# EAGLE board Detector_oneside (EAGLE 5.11)
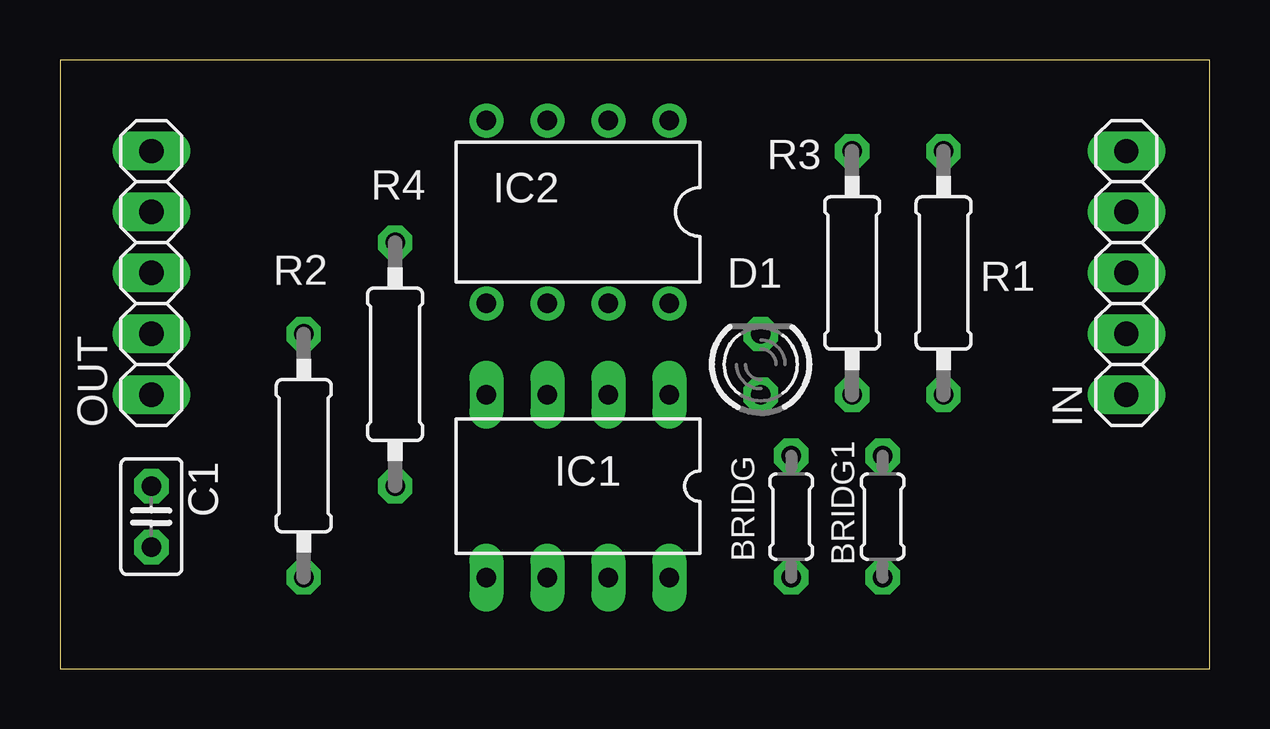
[diagram p0: board, top side]
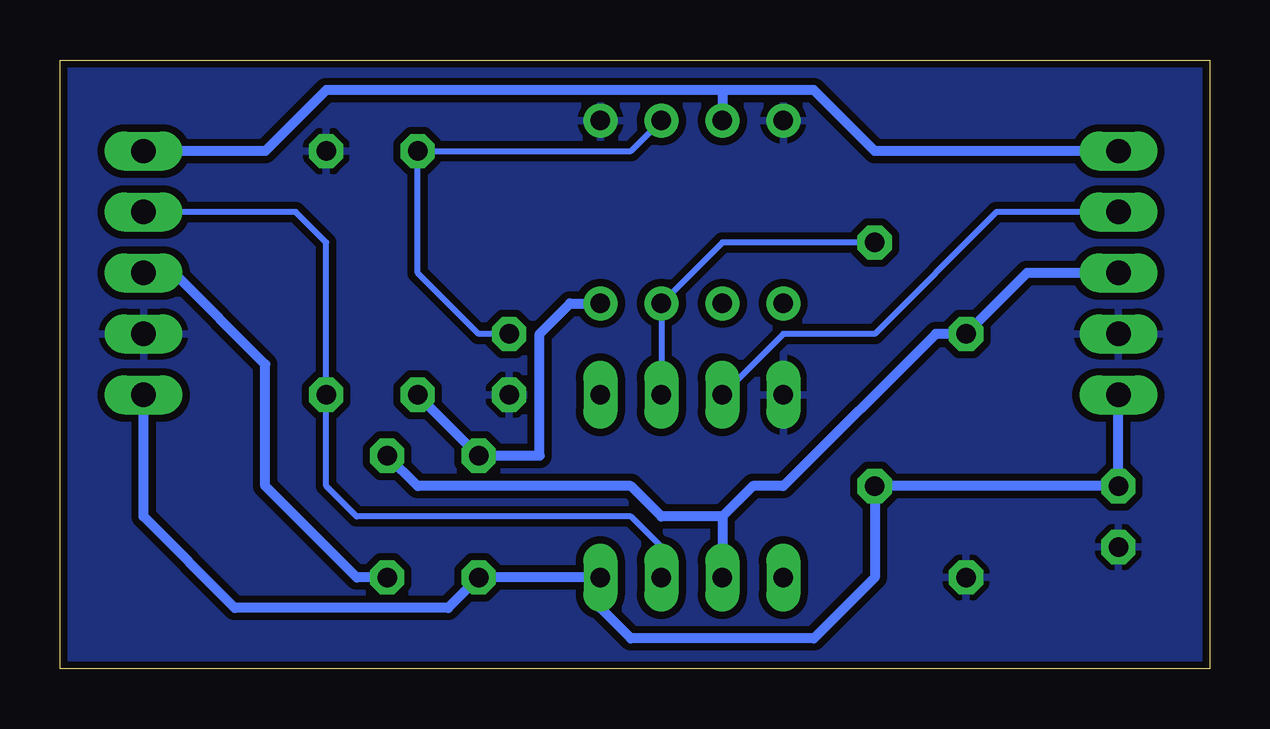
[diagram p1: board, bottom side, seen from below]

Size 47.93 x 25.39 mm. Coordinates in mm from the lower left corner, seen from the top.
Outline: 0,0 47.93,0 47.93,25.39 0,25.39 0,0
Copper layers (1*16): Top 0.035mm / dielectric 1.5mm / Bottom 0.035mm
Design rules "SparkFun": minimum track width 8mil, minimum drill 20mil, track to track 8mil, track to pad 8mil, pad to pad 8mil, via to via 8mil, smd to smd 8mil, copper to edge 10mil, drill to drill 8mil, minimum pad ring 12mil, minimum via ring 10mil, stop-mask expansion 4mil, vias tented up to drill 25mil, thermal gap 10mil

## Footprints (pad centres in the part's own frame; a part is rotated, then mirrored left to right if it is on the bottom)
0204/5 = drill 0.813 octagon: 1 -2.54,0; 2 2.54,0
C025-025X050 = drill 0.813 octagon: 1 -1.27,0; 2 1.27,0
LED3MM = drill 0.813 octagon: A -1.27,0; K 1.27,0
DIL08 = drill 0.813 long: 1 -3.81,-3.81; 2 -1.27,-3.81; 3 1.27,-3.81; 4 3.81,-3.81; 5 3.81,3.81; 6 1.27,3.81; 7 -1.27,3.81; 8 -3.81,3.81
DIL08' = drill 0.813 pad 1.27 round: 1 -3.81,-3.81; 2 -1.27,-3.81; 3 1.27,-3.81; 4 3.81,-3.81; 5 3.81,3.81; 6 1.27,3.81; 7 -1.27,3.81; 8 -3.81,3.81
1X05 = drill 1.016 long: 1 -5.08,0; 2 -2.54,0; 3 0,0; 4 2.54,0; 5 5.08,0
0207/10 = drill 0.813 octagon: 1 -5.08,0; 2 5.08,0

## Placement (x,y rotation side)
BRIDG  [0204/5]  30.48,6.35 270 top
BRIDG1  [0204/5]  34.29,6.35 90 top
C1  [C025-025X050]  3.81,6.35 270 top
D1  TLLY4400  [LED3MM]  29.21,12.7 90 top
IC1  TINY13-20PU  [DIL08]  21.59,7.62 180 top
IC2  LM311N  [DIL08']  21.59,19.05 180 top
IN  [1X05]  44.45,16.51 90 top
OUT  [1X05]  3.81,16.51 90 top
R1  [0207/10]  36.83,16.51 270 top
R2  [0207/10]  10.16,8.89 90 top
R3  [0207/10]  33.02,16.51 270 top
R4  [0207/10]  13.97,12.7 270 top

## Library data of the parts
BRIDG BRIDG1 C1 R1-R4 = rcl
D1 = led; MF: VISHAY SEMICONDUCTOR; OC_FARNELL: 1612439
IC1 = atmel; MPN: ATTINY13-20PU; OC_FARNELL: 9171550; OC_NEWARK: 96K6521
IC2 = linear
IN OUT = pinhead

## Nets
+5V: BRIDG.2 C1.1 IC1.8 IN.1 OUT.1 R4.2
GND: C1.2 D1.A IC1.4 IC2.1 IC2.4 IN.2 OUT.2 R1.1 R2.1
N$1: IC1.7 IN.4 R1.2
N$2: BRIDG1.2 IC1.6 OUT.3 R2.2
N$3: IC1.3 OUT.4
N$4: IC1.2 IC2.7 R4.1
N$5: D1.K IC2.2 R3.1
N$6: IC2.3 IN.5 OUT.5
N$7: BRIDG.1 IC2.8 R3.2
N$8: BRIDG1.1 IN.3

## Tracks (layer width: path | path; a pad name or v marks a point on that pad's centre or on a via)
+5V
  Bottom 0.406: OUT.1 C1.1 R4.2 13.97,3.81 16.51,1.27 24.13,1.27 25.4,2.54 IC1.8 BRIDG.2 31.75,2.54 40.64,2.54 44.45,6.35 IN.1
GND
  pour Bottom (isolate 0.305): 0,25.4 48.26,25.4 48.26,0 0,0
N$1
  Bottom 0.254: IC1.7 22.86,5.08 24.13,6.35 35.56,6.35 36.83,7.62 R1.2 36.83,17.78 38.1,19.05 IN.4
N$2
  Bottom 0.406: 20.32,6.35 19.05,7.62 17.78,7.62 11.43,13.97 R2.2 7.62,16.51 OUT.3 | 20.32,6.35 IC1.6 | 20.32,6.35 22.86,6.35 24.13,7.62 33.02,7.62 BRIDG1.2
N$3
  Bottom 0.254: IC1.3 17.78,13.97 13.97,13.97 8.89,19.05 OUT.4
N$4
  Bottom 0.254: R4.1 20.32,17.78 IC2.7 IC1.2
N$5
  Bottom 0.254: D1.K 30.48,13.97 33.02,16.51 R3.1 24.13,21.59 IC2.2
N$6
  Bottom 0.406: 20.32,24.13 16.51,24.13 13.97,21.59 OUT.5 | 20.32,24.13 36.83,24.13 39.37,21.59 IN.5 | 20.32,24.13 IC2.3
N$7
  Bottom 0.406: R3.2 BRIDG.1 27.94,8.89 27.94,13.97 26.67,15.24 IC2.8
N$8
  Bottom 0.406: BRIDG1.1 35.56,3.81 39.37,7.62 39.37,12.7 43.18,16.51 IN.3